# Altium PCB MOCO控制器V1.PcbDoc (part 2 of 2)
Units mm, origin at the board's own origin, x right, y up, seen from the top; angles counter-clockwise.
Board outline 43.94 x 28.83 mm, 4 copper layers (Top Layer, Mid-Layer 1, Mid-Layer 2, Bottom Layer); 67 components, 72 nets, 283 pads, 90 vias.
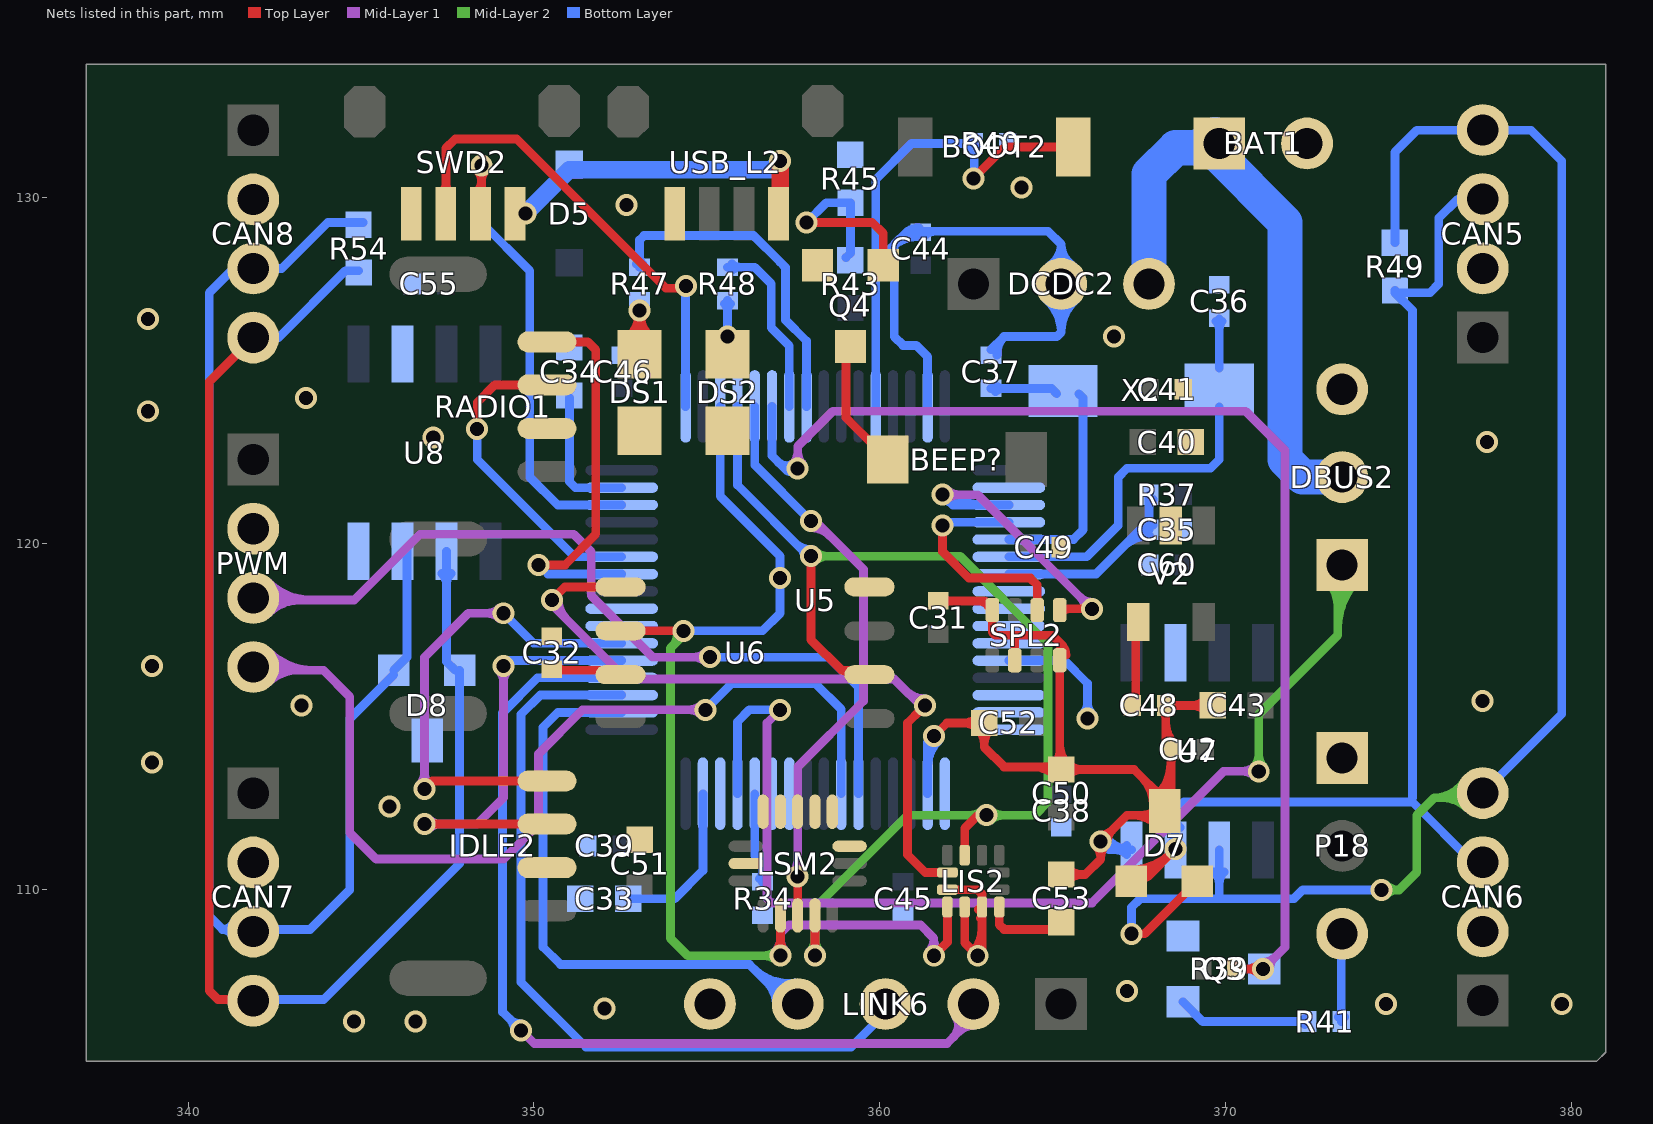
[diagram p4: the nets of this part, all layers, seen from the top]

## Via types
v1: diameter 0.635, hole 0.406, Top Layer to Bottom Layer, 88 vias
v2: diameter 2.5, hole 2.5, Top Layer to Bottom Layer, 2 vias

## Nets (pads, with @x,y where several pads share a name; then routed paths per layer and width w, separated by ;. In a path a pad name is that pad's centre, name@x,y a point inside that pad or via, vN(x,y) a via of type N, cw(c..) or ccw(c..) an arc to the next point about the centre after c; other vN are vias at no path point) (continued)
GND: BAT1.2 C31.2 C32.1 C33.2 C34.2 C35.1 C36.1 C37.1 C38.2 C39.2 C40.2 C41.1 C42.2 C43.2 C44.2 C45.2 C46.2 C48.2 C49.2 C50.1 C51.1 C52.2 C53.2 C55.1 C60.1 CAN5.2 CAN6.2 CAN7.2 CAN8.2 D7.3 D8.3 DBUS2.3 DCDC2.2 DS1.2 DS2.2 IDLE2.2 LINK6.5 LIS2.2 LIS2.3 LIS2.12 LSM2.8 LSM2.9 LSM2.10 LSM2.11 LSM2.12 LSM2.13 LSM2.15 P18.1 PWM.2 Q3.1 Q4.1 R34.1 R40.1 R45.1 RADIO1.2 SPL2.1 SPL2.5 SPL2.7 SWD2.1 U5.12 U5.18 U5.63 U6.4 U7.2 U7.8 U8.2 U8.8 USB_L2.1 V2.2 | length 79.7
  Top Layer w0.254: v1(361.569,114.427) 361.95,114.808 C52.2@362.966,114.808 ; C31.2@361.696,118.339 362.991,118.339 ; C31.2@361.832,118.249 cw(c362.049,118.032) 362.049,118.339 cw(c362.049,118.645) C31.2@361.832,118.428 ; LIS2.12@361.962,109.986 362.835,109.986 362.966,109.855 LIS2.3@362.966,109.22 ; 362.412,114.808 ccw(c362.412,115.427) C52.2@362.85,114.989 ; 362.42,114.808 cw(c362.42,114.2) 362.85,114.63 cw(c362.416,114.196) 363.029,114.196 cw(c363.643,114.196) C52.2@363.209,114.63 ; LIS2.2@362.462,109.486 362.462,108.454 v1(362.839,108.077) ; v1@362.704,108.212 ccw(c362.082,108.834) 362.962,108.834 ; 362.806,118.339 cw(c362.806,117.768) SPL2.1@363.209,118.171 ; v1@362.839,107.95 362.962,108.073 LIS2.3@362.962,109.22 ; LIS2.3@362.86,109.41 ccw(c362.832,109.541) LIS2.3@362.966,109.541 ; 362.914,109.162 ccw(c362.9,109.226) LIS2.3@362.966,109.226 ; C52.2@363.029,114.81 363.029,114.109 363.601,113.538 C50.1@365.125,113.538 ; SPL2.1@363.192,118.198 ccw(c362.991,118.125) 362.991,118.339 ; SPL2.1@363.22,118.11 362.991,118.339 ; SPL2.1@363.261,118.073 363.261,117.434 363.347,117.348 363.855,117.348 ; SPL2.7@363.911,116.623 363.911,117.292 363.855,117.348 ; 364.455,113.538 cw(c364.455,112.665) C50.1@365.072,113.282 ; 364.823,113.538 ccw(c364.823,113.891) 365.072,113.641 ccw(c364.738,113.976) 365.211,113.976 ; SPL2.5@365.159,116.825 ccw(c364.936,117.048) 365.252,117.048 ; C50.1@365.17,113.538 365.211,113.497 SPL2.5@365.211,116.623 ; 365.211,114.174 ccw(c365.964,114.174) 365.432,113.641 ccw(c365.865,114.075) 365.865,113.462 ccw(c365.865,112.849) C50.1@365.432,113.282 ; C50.1@365.252,113.462 367.36,113.462 368.173,112.649 D7.3@368.173,112.395 ; SPL2.5@365.252,116.586 365.252,117.094 364.998,117.348 363.855,117.348 ; C53.2@365.254,110.426 365.95,110.426 366.395,110.871 v1(366.395,111.379) 367.157,112.141 D7.3@368.173,112.141 ; 365.264,117.082 cw(c364.955,116.773) SPL2.5@365.392,116.773 ; C53.2@365.433,110.247 cw(c365.867,109.813) 365.867,110.426 cw(c365.867,111.04) C53.2@365.433,110.606 ; v1@366.26,111.244 cw(c365.935,110.919) 366.395,110.919 cw(c366.855,110.919) v1@366.53,111.244 ; v1@366.395,111.569 ccw(c366.395,112.029) 366.72,111.704 ccw(c367.045,111.379) v1@366.585,111.379 ; 367.329,112.141 cw(c367.329,111.17) D7.3@368.016,111.857 ; 367.575,112.141 ccw(c367.575,112.765) D7.3@368.016,112.324 ; 367.596,113.226 cw(c366.815,112.446) D7.3@367.919,112.446 ; 367.902,112.92 ccw(c368.249,113.266) D7.3@368.249,112.776 ; D7.3@368.016,112.679 ccw(c367.023,113.672) 368.427,113.672 ; C48.2@368.185,115.18 cw(c367.968,114.963) 368.275,114.963 cw(c368.581,114.963) C48.2@368.364,115.18 ; D7.3@368.195,112.5 ccw(c367.636,113.059) 368.427,113.059 ; 368.275,114.828 ccw(c369.188,114.828) C42.2@368.542,114.182 ; D7.3@368.3,112.268 368.427,112.395 368.427,114.046 368.275,114.198 C48.2@368.275,115.316 C43.2@369.697,115.316 ; C48.2@368.364,115.226 cw(c368.581,115.009) 368.581,115.316 cw(c368.581,115.623) C48.2@368.364,115.406 ; 368.427,113.632 cw(c368.82,113.632) C42.2@368.542,113.91 ; 369.016,115.316 ccw(c369.016,115.935) C43.2@369.454,115.497 ; 369.024,115.316 cw(c369.024,114.708) C43.2@369.454,115.138
  Bottom Layer w0.254: 360.31,128.535 cw(c361.142,127.703) C44.2@361.142,128.88 ; 360.744,128.969 cw(c361.142,128.57) C44.2@361.142,129.134 ; C44.2@361.324,128.917 cw(c361.602,128.639) 361.602,129.032 ; U5.18@361.39,112.764 361.39,114.248 v1(361.569,114.427) ; U5.18@361.39,113.535 cw(c362.461,113.535) v1@361.704,114.292 ; 361.39,114.148 cw(c361.848,114.148) v1@361.524,114.472 ; U5.63@361.39,123.964 361.39,125.401 361.061,125.73 360.68,125.73 360.426,125.984 360.426,128.651 360.807,129.032 364.871,129.032 365.252,128.651 ; C37.1@363.22,125.603 363.601,125.984 ; C37.1@363.393,125.455 cw(c364.104,125.481) 363.601,125.984 ; U5.12@363.74,116.614 365.351,116.614 366.014,115.951 v1(366.014,114.935) ; DCDC2.2@364.836,127.044 cw(c363.997,126.111) 365.252,126.111 ; DCDC2.2@364.914,128.032 ccw(c364.515,128.651) 365.252,128.651 ; DCDC2.2@365.005,127.233 cw(c364.509,126.681) 365.252,126.681 cw(c365.995,126.681) DCDC2.2@365.499,127.233 ; DCDC2.2@365.59,128.032 cw(c365.989,128.651) 365.252,128.651 ; DCDC2.2@365.668,127.044 ccw(c366.507,126.111) 365.252,126.111 ; v1@365.879,115.07 ccw(c365.554,115.395) 366.014,115.395 ccw(c366.474,115.395) v1@366.149,115.07 ; v1@366.345,111.34 ccw(c366.758,111.667) 366.758,111.14 ; v1(366.395,111.379) 366.634,111.14 U7.8@367.284,111.14 cw(c367.284,112.084) v1@366.544,111.497 ; U7.8@367.149,111.005 ccw(c366.824,110.68) 366.824,111.14 ccw(c366.824,111.6) U7.8@367.149,111.275 ; 363.601,125.984 365.125,125.984 365.252,126.111 ; 365.252,126.111 DCDC2.2@365.252,127.508 365.252,128.651
  other v1: 344.805,106.172 346.583,106.172 352.044,106.553 374.65,106.68 379.73,106.68 367.157,107.061 345.821,112.395 338.963,113.665 343.281,115.316 377.444,115.443 338.963,116.459 377.571,122.936 347.091,123.063 338.836,123.825 343.408,124.206 366.776,125.984 338.836,126.492 352.679,129.794 364.109,130.302
GROUND1: U5.8
GROUND2: U5.9
GROUND3: U5.10
GROUND4: U5.11
LED1: R47.1 U5.56 | length 10.2
  Bottom Layer w0.254: R47.1@352.97,128.08 ccw(c352.753,128.297) 353.06,128.297 ccw(c353.367,128.297) R47.1@353.15,128.08 ; R47.1@353.06,127.991 353.06,128.778 353.187,128.905 356.362,128.905 357.124,128.143 357.276,127.991 357.276,126.467 357.886,125.857 U5.56@357.886,123.952
LED2: R48.1 U5.55 | length 5.7
  Bottom Layer w0.254: R48.1@355.6,127.991 356.387,127.991 356.87,127.508 356.87,126.238 357.39,125.718 U5.55@357.39,123.964 ; R48.1@355.736,127.901 cw(c355.953,127.684) 355.953,127.991 cw(c355.953,128.297) R48.1@355.736,128.08
NetBEEP?_2: BEEP?.2 Q4.3 | length 3.8
  Top Layer w0.254: Q4.3@359.029,125.73 359.029,123.635 BEEP?.2@360.236,122.428
NetBOOT2_2: BOOT2.2 R40.2 U5.60 | length 15.1
  Top Layer w0.254: v1(362.712,130.556) 363.626,131.47 BOOT2.2@365.608,131.47
  Bottom Layer w0.254: U5.60@359.89,123.964 359.89,130.528 360.934,131.572 R40.2@362.712,131.572 ; R40.2@362.648,131.436 cw(c362.431,131.219) 362.737,131.219 cw(c363.044,131.219) R40.2@362.827,131.436 ; R40.2@362.648,131.482 ccw(c362.431,131.265) 362.431,131.572 ccw(c362.431,131.879) R40.2@362.648,131.662 ; R40.2@362.737,131.572 362.737,130.658 v1@362.839,130.556
NetC32_2: C32.2 U6.7 | length 2.3
  Top Layer w0.254: C32.2@350.52,116.332 352.381,116.332 U6.7@352.508,116.205 ; C32.2@350.656,116.447 ccw(c350.934,116.725) 350.934,116.332
NetC33_1: C33.1 U5.31 | length 4.6
  Bottom Layer w0.254: C33.1@352.806,109.728 354.076,109.728 354.89,110.542 U5.31@354.89,112.764
NetC34_1: C34.1 U5.47 | length 4
  Bottom Layer w0.254: C34.1@351.028,124.206 351.028,121.793 351.207,121.614 U5.47@352.54,121.614
NetC35_2: C35.2 R37.1 U5.7 | length 7.5
  Bottom Layer w0.254: U5.7@363.74,119.114 366.256,119.114 367.538,120.396 367.792,120.396 367.792,121.387 R37.1@367.817,121.412 ; 367.045,119.903 cw(c367.817,119.131) C35.2@367.817,120.223 ; 367.479,120.337 cw(c367.817,119.998) C35.2@367.817,120.477 ; 367.792,120.81 ccw(c368.185,120.81) C35.2@367.907,120.532 ; 367.792,120.998 cw(c368.185,120.998) R37.1@367.907,121.276
NetC36_2: C36.2 U5.6 X2.1 | length 11.5
  Bottom Layer w0.254: U5.6@363.74,119.614 365.994,119.614 366.903,120.523 366.903,121.92 367.157,122.174 369.57,122.174 369.824,122.428 X2.1@369.824,123.952 ; C36.2@369.734,126.428 cw(c369.517,126.211) 369.824,126.211 cw(c370.131,126.211) C36.2@369.914,126.428 ; X2.1@369.824,125.07 C36.2@369.824,126.492
NetC37_2: C37.2 U5.5 X2.2 | length 8.7
  Bottom Layer w0.254: C37.2@363.22,124.485 364.973,124.485 X2.2@365.125,124.333 ; C37.2@363.356,124.396 cw(c363.573,124.179) 363.573,124.485 cw(c363.573,124.792) C37.2@363.356,124.575 ; U5.5@363.74,120.114 365.605,120.114 365.887,120.396 365.887,124.206 X2.2@365.76,124.333
NetC48_1: C48.1 V2.4 | length 2.6
  Top Layer w0.254: C48.1@367.309,115.316 367.411,115.418 V2.4@367.411,117.856
NetC53_1: C53.1 LIS2.4 | length 2.4
  Top Layer w0.254: LIS2.4@363.462,109.486 363.462,108.978 363.601,108.839 C53.1@365.252,108.839
NetCAN5_3: CAN5.3 CAN6.3 D7.1 R49.2 U7.7 | length 35.8
  Top Layer w0.254: D7.1@367.284,110.312 ccw(c367.284,111.324) 367.999,110.608 ; D7.1@367.284,110.566 ccw(c367.284,112.191) v1@368.433,111.042 ; D7.1@367.411,110.363 367.754,110.363 ; D7.1@367.525,110.462 ccw(c367.754,110.678) 367.754,110.363 ; D7.1@367.614,110.227 cw(c367.754,110.223) 367.754,110.363 ; v1(368.554,111.163) 367.754,110.363
  Bottom Layer w0.254: U7.7@368.419,111.298 ccw(c368.094,111.623) 368.554,111.623 ccw(c369.014,111.623) U7.7@368.689,111.298 ; U7.7@368.419,111.783 ccw(c368.094,112.108) 368.554,112.108 ccw(c369.014,112.108) U7.7@368.689,111.783 ; U7.7@368.554,111.14 v1(368.554,111.163) 368.554,112.268 368.808,112.522 375.412,112.522 CAN6.3@377.19,110.744 ; R49.2@374.906,127.317 R49.2@374.937,127.287 ; 375.412,112.649 375.412,126.746 374.904,127.254 375.92,127.254 376.174,127.508 376.174,129.413 376.72,129.959 CAN5.3@377.444,129.959 ; CAN6.3@377.253,110.807 CAN6.3@377.317,110.744
NetCAN5_4: CAN5.4 CAN6.4 D7.2 R49.1 U7.6 | length 49.5
  Top Layer w0.254: v1(367.284,108.712) 367.665,108.712 D7.2@369.189,110.236
  Mid-Layer 2 w0.254: v1(374.523,109.982) 375.031,109.982 375.539,110.49 375.539,112.141 376.047,112.649 ; v1@374.658,109.847 cw(c374.983,109.522) 374.983,109.982 cw(c374.983,110.442) v1@374.658,110.117 ; 376.26,112.649 cw(c376.26,111.598) CAN6.4@377.003,112.341 ; 376.517,112.649 ccw(c376.517,113.388) CAN6.4@377.135,112.984 ; CAN6.4@376.923,113.123 cw(c376.047,113.695) 376.047,112.649 ; CAN6.4@377.317,112.649 376.047,112.649
  Bottom Layer w0.254: v1(367.284,108.712) 367.284,109.474 367.538,109.728 369.824,109.728 ; U7.6@369.689,110.497 cw(c369.364,110.172) 369.824,110.172 cw(c370.284,110.172) U7.6@369.959,110.497 ; U7.6@369.824,111.14 369.824,109.728 ; v1(374.523,109.982) 372.237,109.982 371.983,109.728 370.205,109.728 369.824,109.728 ; R49.1@374.904,128.702 374.904,131.318 375.539,131.953 377.444,131.953 378.841,131.953 379.73,131.064 379.73,125.349 ; CAN6.4@377.444,112.782 379.73,115.068 379.73,125.349 ; 379.73,126.492 379.73,125.349
NetCAN7_3: CAN7.3 CAN8.3 D8.1 R54.2 U8.7 | length 41
  Bottom Layer w0.254: 340.614,109.474 340.614,111.125 ; CAN7.3@341.281,108.618 ccw(c340.995,108.543) 340.995,108.839 ; CAN7.3@341.322,109.045 cw(c340.995,109.202) 340.995,108.839 ; CAN8.3@341.884,127.953 342.71,127.953 344.043,129.286 R54.2@345.059,129.286 ; CAN8.3@341.884,128.016 341.376,128.016 340.614,127.254 340.614,111.125 ; D8.1@345.948,116.205 344.678,114.935 344.678,109.982 343.535,108.839 340.995,108.839 ; D8.1@345.948,116.332 346.329,116.713 U8.7@346.329,119.888 ; 340.614,111.125 340.614,109.22 340.995,108.839
NetCAN7_4: CAN7.4 CAN8.4 D8.2 R54.1 U8.6 | length 42
  Top Layer w0.254: CAN7.4@341.884,106.807 340.868,106.807 340.614,107.061 340.614,124.683 CAN8.4@341.884,125.953
  Bottom Layer w0.254: CAN8.4@341.884,125.953 342.615,125.953 344.551,127.889 R54.1@344.932,127.889 ; CAN7.4@342.011,106.807 343.916,106.807 347.853,110.744 D8.2@347.853,116.332 ; U8.6@347.337,119.133 cw(c347.012,118.808) 347.472,118.808 cw(c347.932,118.808) U8.6@347.607,119.133 ; U8.6@347.472,119.776 347.472,116.586 D8.2@347.726,116.332
NetD5_1: D5.1 SWD2.4 USB_L2.4 | length 10
  Top Layer w0.508: SWD2.4@349.504,129.794 349.504,129.54 v1(349.758,129.54) ; USB_L2.4@357.124,129.54 v1(357.124,131.064)
  Bottom Layer w0.508: v1(349.758,129.54) 351.028,130.81 356.87,130.81 v1(357.124,131.064)
NetDS1_1: DS1.1 R47.2 | length 4.4
  Top Layer w0.254: DS1.1@352.704,125.904 ccw(c351.885,126.744) v1(353.058,126.744) ; v1@352.924,126.61 cw(c352.598,126.284) 353.058,126.284 cw(c353.518,126.284) v1@353.193,126.61 ; DS1.1@353.058,125.982 DS1.1@353.058,125.475 v1(353.058,126.744) ; DS1.1@353.413,125.904 cw(c354.231,126.744) v1(353.058,126.744)
  Mid-Layer 1 w0.254: v1(353.058,126.744) v1@353.06,126.746
NetDS2_1: DS2.1 R48.2 | length 2.8
  Top Layer w0.254: DS2.1@355.464,125.848 cw(c355.138,125.522) 355.598,125.522 cw(c356.058,125.522) DS2.1@355.733,125.848 ; DS2.1@355.598,125.475 v1(355.598,125.982)
  Bottom Layer w0.254: R48.2@355.51,126.936 cw(c355.293,126.719) 355.6,126.719 cw(c355.907,126.719) R48.2@355.69,126.936 ; v1@355.6,125.984 R48.2@355.6,127.025
NetP18_3: P18.3 R41.2 | length 3.2
  Bottom Layer w0.254: R41.2@373.265,106.308 ccw(c373.048,106.525) 373.355,106.525 ccw(c373.661,106.525) R41.2@373.444,106.308 ; R41.2@373.355,106.172 373.355,108.687 P18.3@373.38,108.712 P18.3@373.507,108.839
NetQ3_2: Q3.2 R41.1 | length 4.3
  Bottom Layer w0.254: Q3.2@368.776,106.746 369.35,106.172 R41.1@372.364,106.172 ; R41.1@372.3,106.082 ccw(c372.083,105.865) 372.083,106.172 ccw(c372.083,106.479) R41.1@372.3,106.262
NetQ4_2: Q4.2 R43.1 R45.2 | length 6.4
  Top Layer w0.254: v1(357.886,129.286) 359.791,129.286 360.106,128.971 Q4.2@360.106,128.048
  Bottom Layer w0.254: v1(357.886,129.286) 358.457,129.857 R45.2@359.158,129.857 359.158,128.399 R43.1@359.029,128.27
NetR34_2: R34.2 U5.28 | length 3.1
  Bottom Layer w0.254: U5.28@356.39,112.764 356.39,110.97 356.616,110.744 R34.2@356.616,110.211 ; R34.2@356.526,110.3 ccw(c356.309,110.517) 356.616,110.517 ccw(c356.923,110.517) R34.2@356.706,110.3
NRF_CE: U5.2
POWER: BAT1.1 DBUS2.2 DCDC2.3 | length 18.4
  Bottom Layer w1.016: DCDC2.3@367.792,127.508 367.792,130.683 368.554,131.445 BAT1.1@369.697,131.445 ; 368.933,131.445 ccw(c368.933,132.463) BAT1.1@369.653,131.743 ; BAT1.1@369.697,131.826 BAT1.1@369.697,131.572 ; BAT1.1@369.824,131.572 BAT1.1@369.697,131.572 ; DBUS2.2@373.38,121.92 372.237,121.92 371.729,122.428 371.729,129.286 369.697,131.318 BAT1.1@369.697,131.445 ; BAT1.1@369.697,131.445 BAT1.1@369.697,131.572
PWM1: U5.14
PWM2: U5.15
PWM3: U5.16
PWM4: U5.17
PWM5: PWM.3 U5.22 | length 28.3
  Mid-Layer 1 w0.254: PWM.3@341.503,118.364 344.805,118.364 346.71,120.269 351.155,120.269 351.663,119.761 351.663,118.491 353.441,116.713 v1(355.092,116.713) ; PWM.3@342.145,118.689 ccw(c342.929,119.473) 342.929,118.364 ; PWM.3@342.325,117.987 cw(c343.234,117.078) 343.234,118.364 ; PWM.3@342.325,118.869 ccw(c343.543,120.087) 343.543,118.364 ; v1@354.957,116.578 ccw(c354.632,116.253) 354.632,116.713 ccw(c354.632,117.173) v1@354.957,116.848
  Bottom Layer w0.254: v1(355.092,116.713) 358.521,116.713 359.39,115.844 U5.22@359.39,112.764
PWM6: PWM.4 U5.23 | length 31.8
  Mid-Layer 1 w0.254: PWM.4@341.757,116.332 343.916,116.332 344.678,115.57 344.678,111.633 345.44,110.871 349.123,110.871 350.139,111.887 350.139,113.919 351.409,115.189 v1(354.965,115.189) ; PWM.4@342.145,116.689 ccw(c343.007,117.551) 343.007,116.332 ; PWM.4@342.325,115.987 cw(c343.156,115.156) 343.156,116.332 ; PWM.4@342.325,116.869 ccw(c343.62,118.164) 343.62,116.332 ; v1@354.83,115.054 ccw(c354.505,114.729) 354.505,115.189 ccw(c354.505,115.649) v1@354.83,115.324
  Bottom Layer w0.254: v1(354.965,115.189) 355.282,115.506 355.727,115.951 358.14,115.951 358.89,115.201 U5.23@358.89,112.764
PWM7: U5.26
PWM8: U5.27
PWM11: U5.39
PWM12: U5.40
SBUS: Q3.3 R39.1 U5.54 | length 37.7
  Top Layer w0.254: v1(357.632,122.174) v1@357.759,122.174 ; R39.1@370.332,107.696 v1(371.094,107.696) ; R39.1@370.396,107.606 cw(c370.613,107.389) 370.613,107.696 cw(c370.613,108.003) R39.1@370.396,107.786 ; v1@370.959,107.561 ccw(c370.634,107.236) 370.634,107.696 ccw(c370.634,108.156) v1@370.959,107.831
  Mid-Layer 1 w0.254: v1@357.497,122.309 ccw(c357.172,122.634) 357.632,122.634 ccw(c358.092,122.634) v1@357.767,122.309 ; v1(357.632,122.174) 357.632,122.809 358.648,123.825 370.586,123.825 371.729,122.682 371.729,108.331 v1(371.094,107.696) ; v1@371.094,107.886 ccw(c371.094,108.346) 371.419,108.021 ccw(c371.744,107.696) v1@371.284,107.696
  Bottom Layer w0.254: U5.54@356.89,123.964 356.89,122.535 357.251,122.174 v1(357.632,122.174) ; 357.081,122.344 ccw(c357.309,122.573) v1@357.512,122.322 ; 357.28,122.145 ccw(c357.487,122.353) v1@357.672,122.125 ; v1(371.094,107.696) Q3.3@371.126,107.696
SCL_B: SPL2.4 U5.3 | length 12
  Top Layer w0.254: SPL2.4@365.211,118.073 365.248,118.11 v1(366.141,118.11) ; SPL2.4@365.263,118.021 cw(c365.477,117.807) 365.477,118.11
  Mid-Layer 1 w0.254: v1(361.823,121.412) 362.839,121.412 v1@366.014,118.237 ; v1@361.958,121.277 cw(c362.283,120.952) 362.283,121.412 cw(c362.283,121.872) v1@361.958,121.547 ; v1@365.95,118.11 ccw(c365.491,118.11) 365.816,118.435 ccw(c366.141,118.76) v1@366.141,118.3
  Bottom Layer w0.254: v1@361.778,121.367 ccw(c362.389,121.978) 362.389,121.114 ; v1(361.823,121.412) 362.121,121.114 U5.3@363.74,121.114 ; v1@361.958,121.547 ccw(c363.002,122.591) U5.3@363.002,121.114
SCLK_FC: SWD2.2 U5.49 | length 14.9
  Top Layer w0.254: SWD2.2@347.334,130.137 ccw(c347.038,130.433) 347.456,130.433 ccw(c347.874,130.433) SWD2.2@347.578,130.137 ; SWD2.2@347.456,129.54 347.456,131.429 347.726,131.699 349.504,131.699 353.822,127.381 v1@354.457,127.381
  Bottom Layer w0.254: U5.49@354.39,123.964 v1@354.39,127.448
  other v1: 354.397,127.448
SDA_B: SPL2.3 U5.4 | length 6.6
  Top Layer w0.254: v1(361.823,120.523) 361.823,119.761 362.585,118.999 364.363,118.999 364.561,118.801 SPL2.3@364.561,118.073
  Bottom Layer w0.254: v1(361.823,120.523) 361.914,120.614 U5.4@363.74,120.614
SPI2_CK: LINK6.4 U5.34 | length 19.5
  Bottom Layer w0.254: U5.34@352.54,115.114 350.699,115.114 350.266,114.681 350.266,108.331 350.774,107.823 356.235,107.823 LINK6.4@357.378,106.68 ; 356.362,107.696 ccw(c357.356,108.69) LINK6.4@357.547,107.297 ; 356.724,107.334 ccw(c357.443,108.054) LINK6.4@357.582,107.046 ; 356.748,107.31 cw(c356.118,106.68) LINK6.4@357.009,106.68
SPI2_SI: LINK6.2 U5.36 | length 29.4
  Mid-Layer 1 w0.254: v1(349.631,105.918) 350.012,105.537 361.95,105.537 LINK6.2@362.839,106.426 ; 362.141,105.728 ccw(c361.805,106.063) LINK6.2@362.197,106.329 ; 362.299,105.886 cw(c362.712,105.473) LINK6.2@362.712,106.057 ; 362.357,105.944 ccw(c362.063,106.238) LINK6.2@362.407,106.472
  Bottom Layer w0.254: v1@349.44,105.918 ccw(c348.981,105.918) 349.306,106.243 ccw(c349.631,106.568) v1@349.631,106.108 ; v1(349.631,105.918) 349.098,106.451 349.098,115.103 350.108,116.114 U5.36@352.54,116.114
SPI2_SO: LINK6.3 U5.35 | length 22.6
  Bottom Layer w0.254: U5.35@352.54,115.614 350.183,115.614 349.631,115.062 349.631,107.315 351.511,105.435 359.181,105.435 LINK6.3@360.172,106.426
SPI3_CK: LIS2.1 LSM2.2 U5.51 U6.6 | length 36
  Top Layer w0.254: U6.6@352.508,117.475 v1(354.33,117.475) ; v1@356.997,108.22 ccw(c356.672,108.545) 357.132,108.545 ccw(c357.592,108.545) v1@357.267,108.22 ; v1(357.132,108.085) LSM2.2@357.132,109.244 ; v1(361.569,108.077) 361.962,108.47 LIS2.1@361.962,109.486
  Mid-Layer 1 w0.254: v1@356.997,108.22 ccw(c356.672,108.545) 357.132,108.545 ccw(c357.592,108.545) v1@357.267,108.22 ; v1(357.132,108.085) 357.132,108.72 357.378,108.966 361.188,108.966 361.569,108.585 v1(361.569,108.077) v1@361.569,107.95 ; v1@361.434,108.212 ccw(c361.109,108.537) 361.569,108.537 ccw(c362.029,108.537) v1@361.704,108.212
  Mid-Layer 2 w0.254: 354.013,117.031 ccw(c353.682,117.361) v1@354.142,117.442 ; v1(354.33,117.475) 354.33,117.348 353.949,116.967 353.949,108.585 354.457,108.077 v1@357.124,108.077 ; 356.653,108.077 ccw(c356.653,108.564) v1@356.997,108.22 ; 356.691,108.077 cw(c356.691,107.644) v1@356.997,107.95 ; v1@357.124,108.085 v1(357.132,108.085)
  Bottom Layer w0.254: v1(354.33,117.475) 356.616,117.475 357.124,117.983 v1(357.124,118.999) 357.124,119.634 355.39,121.368 U5.51@355.39,123.964
SPI3_SI: LIS2.11 LSM2.3 U5.53 U6.5 | length 39.9
  Top Layer w0.254: v1(350.52,118.364) 350.901,118.745 U6.5@352.508,118.745 ; LSM2.3@357.632,109.244 v1(357.632,110.363) ; v1@361.188,115.189 360.807,114.808 360.807,110.998 361.319,110.486 LIS2.11@361.962,110.486 ; v1@361.315,115.189 v1(361.315,115.316)
  Mid-Layer 1 w0.254: v1@350.393,118.237 350.393,118.364 v1@350.52,118.237 ; v1(350.52,118.364) v1@350.52,118.237 ; v1@350.71,118.364 ccw(c351.477,118.364) 350.935,117.822 ; v1@357.497,110.498 ccw(c357.172,110.823) 357.632,110.823 ccw(c358.092,110.823) v1@357.767,110.498 ; v1(357.632,110.363) 357.632,113.538 359.537,115.443 359.537,116.078 ; v1@358.013,120.459 cw(c358.013,119.693) 358.555,120.235 ; v1@358.077,120.713 359.537,119.253 359.537,116.078 ; 360.773,115.731 ccw(c361.315,116.273) v1@361.315,115.506 ; v1@361.315,115.189 360.426,116.078 359.537,116.078 ; v1@350.52,118.237 352.679,116.078 359.537,116.078
  Bottom Layer w0.254: U5.53@356.39,123.964 356.39,122.273 v1(358.013,120.65)
SPI3_SO: LIS2.9 LSM2.4 U5.52 U6.2 | length 38.6
  Top Layer w0.254: v1(358.013,119.634) 358.013,117.221 358.902,116.332 ; v1(358.132,108.085) LSM2.4@358.132,109.244 ; U6.2@359.115,116.168 ccw(c358.902,116.112) 358.902,116.332 ; U6.2@359.664,116.205 U6.2@359.708,116.205 ; U6.2@359.664,116.332 358.902,116.332 ; LIS2.9@362.462,110.986 362.462,111.764 362.839,112.141 v1(363.093,112.141) ; 362.768,112.07 cw(c363.093,111.745) v1@363.093,112.204
  Mid-Layer 2 w0.254: v1@357.997,108.22 ccw(c357.672,108.545) 358.132,108.545 ccw(c358.592,108.545) v1@358.267,108.22 ; v1(358.013,119.634) 362.331,119.634 364.871,117.094 364.871,114.808 364.871,112.522 364.49,112.141 v1(363.093,112.141) 360.807,112.141 358.132,109.466 v1(358.132,108.085) ; v1@358.148,119.499 cw(c358.473,119.174) 358.473,119.634 cw(c358.473,120.094) v1@358.148,119.769 ; v1@362.958,112.006 ccw(c362.633,111.681) 362.633,112.141 ccw(c362.633,112.601) v1@362.958,112.276 ; v1@363.228,112.006 cw(c363.553,111.681) 363.553,112.141 cw(c363.553,112.601) v1@363.228,112.276
  Bottom Layer w0.254: U5.52@355.89,123.964 355.89,121.69 357.946,119.634 v1(358.013,119.634) ; 357.574,120.006 ccw(c358.013,120.446) v1@358.013,119.825 ; 357.735,119.845 cw(c357.524,119.634) v1@357.822,119.634
SWD_FC: SWD2.3 U5.46 | length 15.4
  Top Layer w0.254: SWD2.3@348.334,130.137 ccw(c347.961,130.51) 348.488,130.51 ; v1@348.353,130.802 cw(c348.028,130.477) 348.488,130.477 cw(c348.948,130.477) v1@348.623,130.802 ; SWD2.3@348.488,129.54 v1(348.488,130.937) ; 348.488,130.355 ccw(c348.796,130.355) SWD2.3@348.578,130.137
  Bottom Layer w0.254: v1(348.488,130.937) 348.488,129.286 349.885,127.889 349.885,121.92 350.691,121.114 U5.46@352.54,121.114
UART1_R_1: RADIO1.3 U5.43 | length 9.1
  Top Layer w0.254: v1(348.361,123.317) 348.361,124.079 348.869,124.587 RADIO1.3@350.266,124.587
  Bottom Layer w0.254: v1(348.361,123.317) 348.361,122.428 351.175,119.614 U5.43@352.54,119.614
UART1_T_1: RADIO1.4 U5.42 | length 11.1
  Top Layer w0.254: v1@350.012,119.38 v1(350.139,119.38) 350.901,119.38 351.79,120.269 351.79,125.603 351.561,125.832 RADIO1.4@350.382,125.832 ; RADIO1.4@350.382,125.857 RADIO1.4@350.393,125.857
  Bottom Layer w0.254: 350.405,119.114 U5.42@352.54,119.114
UART3_R_1: U5.30
UART3_T_1: DBUS2.1 U5.29 | length 36.8
  Mid-Layer 1 w0.254: v1(357.124,115.189) 356.743,114.808 356.743,109.728 356.87,109.601 366.141,109.601 369.951,113.411 v1(370.967,113.411) ; v1@370.832,113.276 ccw(c370.507,112.951) 370.507,113.411 ccw(c370.507,113.871) v1@370.832,113.546
  Mid-Layer 2 w0.254: v1@370.832,113.546 ccw(c370.507,113.871) 370.967,113.871 ccw(c371.427,113.871) v1@371.102,113.546 ; v1(370.967,113.411) 370.967,115.062 373.253,117.348 DBUS2.1@373.253,119.507 ; DBUS2.1@372.939,118.939 cw(c372.183,118.183) 373.253,118.183 cw(c374.577,118.183) DBUS2.1@373.641,119.119 ; 373.253,117.569 cw(c375.191,117.569) DBUS2.1@373.821,118.939
  Bottom Layer w0.254: U5.29@355.89,112.764 355.89,114.844 356.235,115.189 v1(357.124,115.189)
UART6_R_1: IDLE2.4 U5.38 | length 15.4
  Top Layer w0.254: v1(346.837,112.903) 347.066,113.132 IDLE2.4@350.382,113.132
  Mid-Layer 1 w0.254: v1@346.702,113.038 ccw(c346.377,113.363) 346.837,113.363 ccw(c347.297,113.363) v1@346.972,113.038 ; v1(346.837,112.903) 346.837,116.713 348.107,117.983 v1@348.996,117.983 ; v1@348.988,117.848 ccw(c348.663,117.523) 348.663,117.983 ccw(c348.663,118.443) v1@348.988,118.118
  Bottom Layer w0.254: v1(349.123,117.983) 349.992,117.114 U5.38@352.54,117.114
UART6_T_1: IDLE2.3 U5.37 | length 15
  Top Layer w0.254: v1(346.837,111.887) IDLE2.3@350.382,111.887
  Mid-Layer 1 w0.254: v1@346.71,111.887 v1(346.837,111.887) 348.361,111.887 349.123,112.649 v1(349.123,116.459) ; v1@346.972,111.752 cw(c347.297,111.427) 347.297,111.887 cw(c347.297,112.347) v1@346.972,112.022 ; v1@348.988,116.324 cw(c348.663,115.999) 349.123,115.999 cw(c349.583,115.999) v1@349.258,116.324
  Bottom Layer w0.254: v1(349.123,116.459) 349.278,116.614 U5.37@352.54,116.614
pads on no net: IDLE2.GND LIS2.7 LIS2.8 LSM2.6 LSM2.7 LSM2.14 RADIO1.GND SPL2.2 SWD2.1. SWD2.A U5.24 U7.5 U8.5 USB_L2.1. USB_L2.A
copper on no net:
  other v2: 338.582,119.888 377.825,119.888

## Polygon pours and split planes (outlines as drawn)
GND on Top Layer "Top Layer-No Net" (solid, remove dead copper, pour order 1000): 335.973,134.787 335.846,134.66 335.846,101.386 381.82,101.386 383.852,103.418 383.344,103.926 383.344,134.279
GND on Bottom Layer "Top Layer-No Net" (solid, remove dead copper, pour order 1001): 337.297,134.783 337.297,102.271 337.17,102.144 337.805,102.779 383.398,102.779 383.398,135.799 383.525,135.926

## Keep-outs
Keep-Out Layer:
  the board outline again, w0.254

## Silkscreen, mask and mechanical layers (free items; w line width, h text height)
Top Overlay:
  region: 372.618,129.413 372.618,130.302 369.57,130.302 369.57,129.413
  rectangle: 375.412,126.238 376.301,132.207
  rectangle: 375.285,107.061 376.174,113.03
  rectangle: 343.027,106.934 343.916,112.903
  rectangle: 343.154,125.984 344.043,131.953
  lines w0.254: 371.475,117.729 372.11,117.094 374.904,117.094 375.031,117.221 375.031,125.984 374.777,126.238 371.602,126.238 371.475,126.111 371.475,117.729
  text "+-HL" at 337.693,130.556 h1.52 r270
  text "S+G" at 373.761,126.746 h1.52 r90
  text "5V - BAT" at 363.474,125.095 h1.52
  text "+-HL" at 379.095,121.539 h1.52 r90
  text "+-SD" at 338.963,118.491 h1.52 r270
  text "+-HL" at 337.439,116.332 h1.52 r270
  text "+-HL" at 379.222,114.554 h1.52 r90
  text "MOCO V1" at 337.439,112.649 h1.52 r270
  text "S+G" at 371.856,105.664 h1.52 r90
  text "G CK SO SI" at 345.948,105.283 h1.52
Bottom Overlay:
  text "+ GND" at 369.062,132.715 h1.52

## Text inside footprints (layer, text, board x,y; h text height)
BEEP?: Top Overlay "+" at 365.227,121.31 h1.02 r180